# Altium PCB horus_psu.PcbDoc
Units mm, origin at the board's own origin, x right, y up, seen from the top; angles counter-clockwise.
Board outline 32.23 x 19.11 mm, 2 copper layers (Top Layer, Bottom Layer); 23 components, 14 nets, 83 pads, 20 vias.
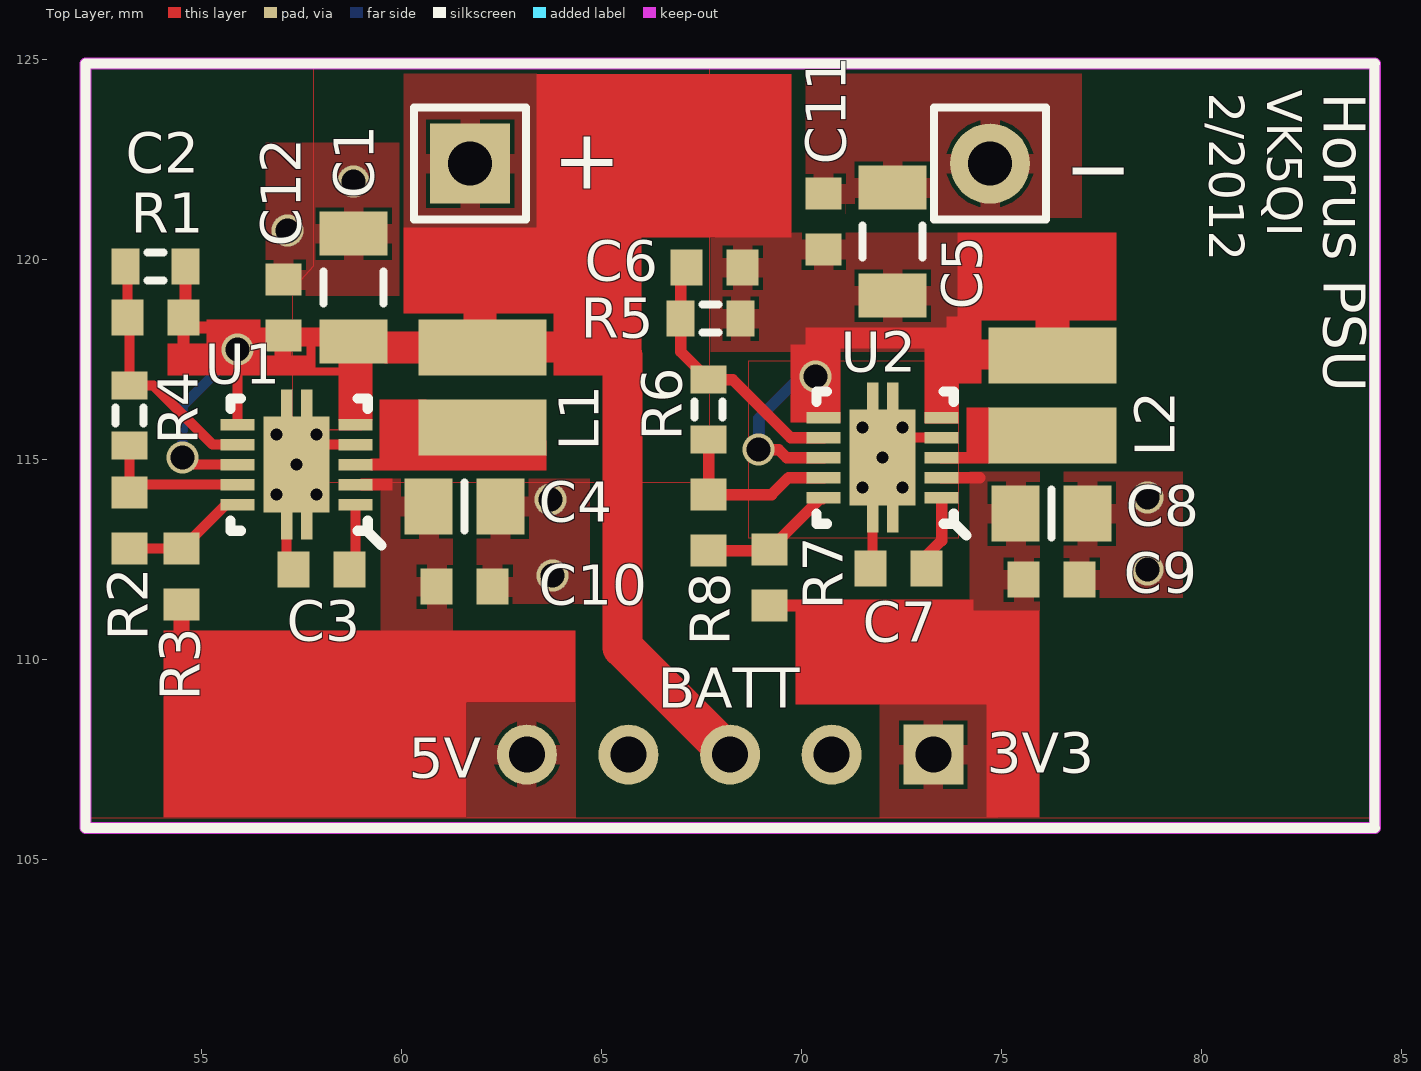
[diagram p0: Top Layer view]
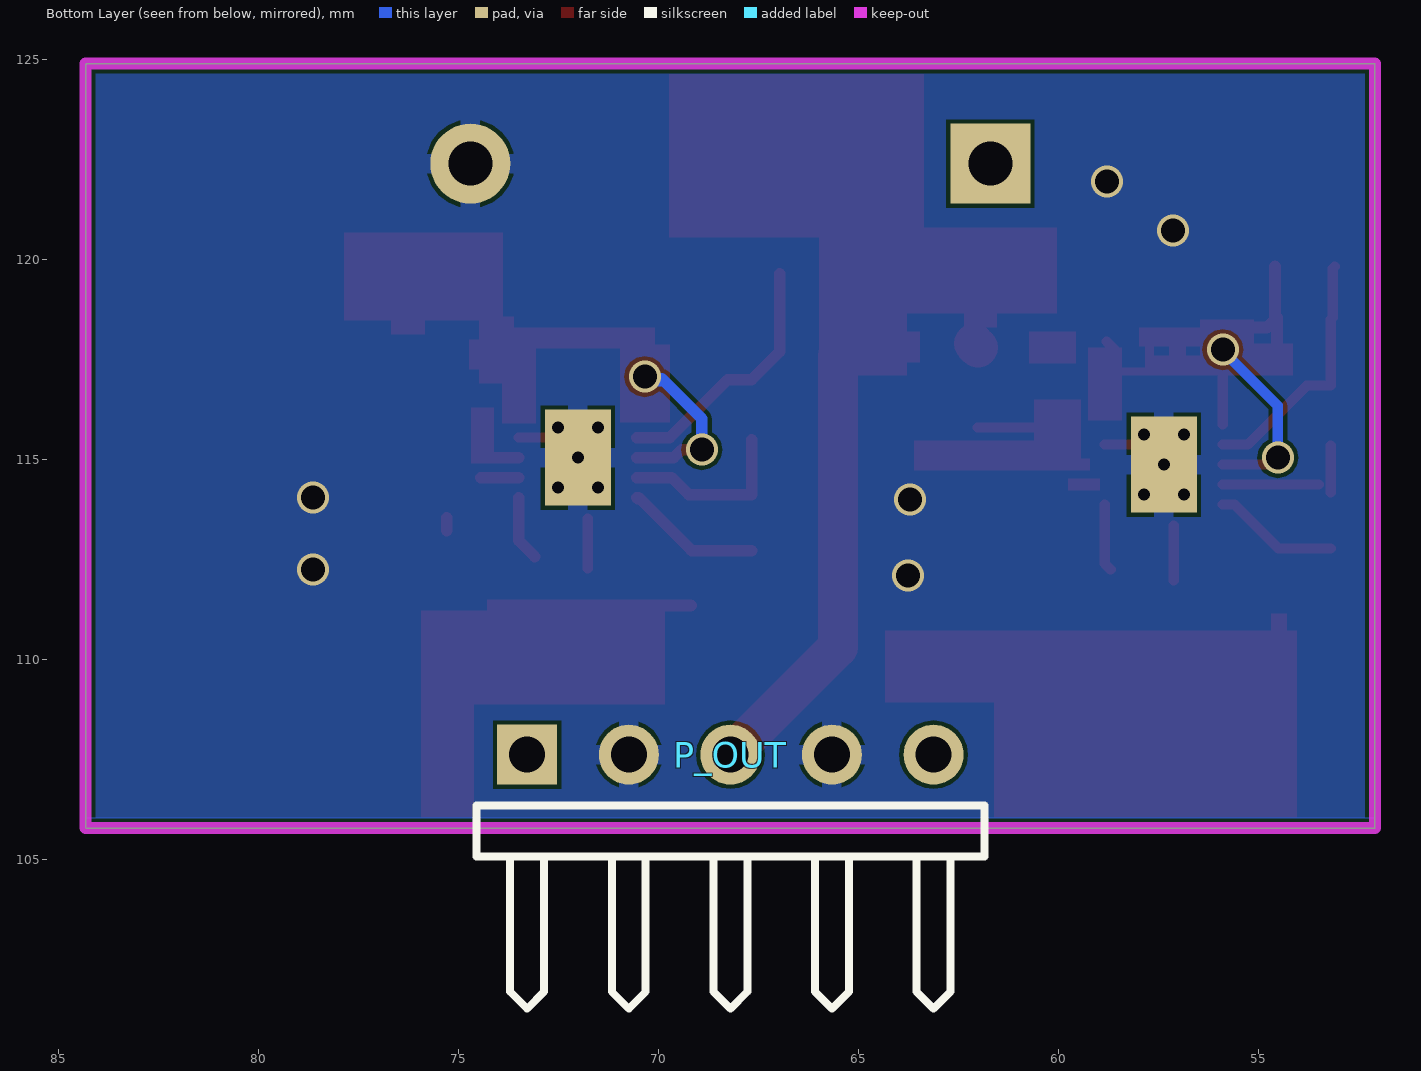
[diagram p1: Bottom Layer view, seen from below]

## Layer stack, top to bottom
Top Layer: signal copper 0.0356
Dielectric: dielectric 0.32, FR-4, Dk 4.8
Bottom Layer: signal copper 0.0356

## Board outline
52.1,105.791 52.1,124.9 84.328,124.9 84.328,105.791

## Design rules (kind name [scope] priority, off if disabled: settings)
Clearance [All] p1: gap=0.1
ComponentClearance [All] p1 off: gap=0.254 collisioncheckmode=3 verticalgap=0.254 showdistances=FALSE
PolygonConnect PolygonConnect_1 [IsVia] p1: connectstyle=Direct reliefconductorwidth=0.254 reliefentries=4 polygonreliefangle="90 Angle"
PolygonConnect [All] p2: connectstyle=Relief reliefconductorwidth=0.5 reliefentries=4 polygonreliefangle="90 Angle"
RoutingVias [All] p1: holewidth=0.3 width=0.4 viastyle="Through Hole" minholewidth=0.711 minwidth=1.27 maxholewidth=0.711 maxwidth=1.27
SilkscreenOverComponentPads [All] p1: minsilkscreentomaskgap=0.254
SolderMaskExpansion [All] p1: expansion=0.102
Width [All] p1: maxlimit=5 minlimit=0.1 preferedwidth=0.3
26 further rules are at their usual default settings.

## Components (designator, comment, footprint, x,y, rotation, side; value= is the part's Value field where it differs from the comment)
C1 "10V" C1206 58.8,119.3 r270 top
C2 "Cap Semi" 1608[0603] 53.85,118.55 r0 top
C3 "Cap Semi" 1608[0603] 58,112.25 r0 top
C4 "6.3V" 6-0805_N 61.575,113.825 r180 top
C5 "10V" C1206 72.275,120.45 r270 top
C6 "Cap Semi" 1608[0603] 67.825,119.8 r0 top
C7 "Cap Semi" 1608[0603] 72.425,112.275 r0 top
C8 "6.3V" 6-0805_N 76.25,113.65 r180 top
C9 "Cap Semi" 1608[0603] 76.25,112 r180 top
C10 "Cap Semi" 1608[0603] 61.575,111.825 r180 top
C11 "Cap Semi" 1608[0603] 70.55,120.95 r270 top
C12 "Cap Semi" 1608[0603] 57.05,118.8 r270 top
L1 "ELLVGG2R2N" ELLVGG 62.025,116.8 r90 top
L2 "ELLVGG2R2N" ELLVGG 76.275,116.6 r90 top
P_OUT "Header 5H" HDR1X5H 73.29,107.625 r180 bottom
R1 "Res3" J1-0603 53.85,119.825 r0 top
R2 "Res3" J1-0603 53.2,116.1 r90 top
R3 "Res3" 1608[0603] 54.5,112.075 r270 top
R4 "Res3" 1608[0603] 53.2,113.475 r270 top
R5 "Res3" J1-0603 67.725,118.525 r0 top
R6 "Res3" J1-0603 67.675,116.25 r90 top
R7 "Res3" 1608[0603] 69.2,112.05 r270 top
R8 "Res3" 1608[0603] 67.675,113.425 r270 top

## Footprints (in the part's own frame and the unit in brackets; to place one, negate y for a bottom-side part, rotate by r counter-clockwise, add the part's x,y. Pads: shape width x height; smd on the part's side, far side on the other; paste and mask are expansions set on the pad)
6-0805_N [mm] "Chip Resistor, Body 2.0x1.2mm, IPC Medium Density"
  rect 1.2x1.4 smd: 1(-0.9,0) 2(0.9,0)
  silkscreen extent 0,-0.6 0,0.6, body extent -1.07,-0.7 1.07,0.7, height 0.7
1608[0603] [mm] "Chip Capacitor, Body 1.6x0.8mm, IPC High Density"
  rect 0.8x0.9 smd: 1(-0.7,0) 2(0.7,0)
  body extent -0.87,-0.48 0.87,0.48, height 1.3
C1206 [mm] "Chip Capacitor, Body 3.2x1.6mm, IPC High Density"
  rect 1.1x1.7 smd: 1(-1.35,0) 2(1.35,0)
  silkscreen extent -0.4,-0.75 0.4,0.75, body extent -1.7,-0.9 1.7,0.9, height 1.3
ELLVGG [mm]
  rect 1.4x3.2 smd: 1(1,0) 2(-1,0)
HDR1X5H [mm] "Connector; Header; 5 Position; Right Angle"
  rect 1.5x1.5 hole 0.9: 1(0,0)
  round 1.5 hole 0.9: 2(2.54,0) 3(5.08,0) 4(7.62,0) 5(10.16,0)
  silkscreen extent -1.27,-6.35 11.43,-1.27
J1-0603 [mm] "Chip Resistor, Body 1.6x0.8mm, IPC High Density"
  rect 0.7x0.9 smd: 1(-0.75,0) 2(0.75,0)
  silkscreen extent -0.2,-0.35 0.2,0.35, body extent -0.85,-0.48 0.85,0.48, height 0.9

## Part data
C1 C4 C5 C8: library part "Cap Semi", "Capacitor (Semiconductor SIM Model)"
C2 C3 C6 C7 C9 C10 C11 C12: "Capacitor (Semiconductor SIM Model)"
L1 L2: library part Inductor, "Inductor"
P_OUT: "Header, 5-Pin, Right Angle"
R1 R2 R3 R4 R5 R6 R7 R8: "Resistor"

## Free pads (board coordinates)
  rect 0.28x0.7 smd: 0(57.125,113.351) 0(57.125,116.399) 0(57.625,113.351) 0(57.625,116.399) 0(71.775,113.526) 0(71.775,116.574) 0(72.275,113.526) 0(72.275,116.574)
  rect 1.65x2.4 smd: 0(57.375,114.875) 0(72.025,115.05)
  rect 1.65x2.4 smd far side: 0(57.375,114.875) 0(72.025,115.05)
  rect 0.85x0.28 smd: 1(58.85,113.875) 1(73.5,114.05) 2(58.85,114.375) 2(73.5,114.55) 3(58.85,114.875) 3(73.5,115.05) 4(58.85,115.375) 4(73.5,115.55) 5(58.85,115.875) 5(73.5,116.05) 6(55.9,115.875) 6(70.55,116.05) 7(55.9,115.375) 7(70.55,115.55) 8(55.9,114.875) 8(70.55,115.05) 9(55.9,114.375) 9(70.55,114.55) 10(55.9,113.875) 10(70.55,114.05)
  rect 2x2 hole 1.1: 1(61.71,122.4)
  round 2 hole 1.1: 1(74.71,122.4)

## Via types
v1: diameter 0.8, hole 0.6, Top Layer to Bottom Layer, tented both sides, 10 vias
v2: diameter 0.4, hole 0.3, Top Layer to Bottom Layer, 10 vias

## Nets (pads, with @x,y where several pads share a name; then routed paths per layer and width w, separated by ;. In a path a pad name is that pad's centre, name@x,y a point inside that pad or via, vN(x,y) a via of type N, cw(c..) or ccw(c..) an arc to the next point about the centre after c; other vN are vias at no path point)
3V3: C8.2 C9.2 P_OUT.1 pad.2@73.5,114.55 R7.2 | length 2.3
  Top Layer w0.28: pad.2@73.5,114.55 74.45,114.55 ; C8.2@75.3,113.225 C8.2@75.3,113.55
  Top Layer w0.3: R7.2 70.175,111.35
5V: C4.2 C10.2 P_OUT.5 pad.2@58.85,114.375 R3.2
GND: C1.1 C3.1 C4.1 C5.1 C7.1 C8.1 C9.1 C10.1 C11.1 C12.1 P_OUT.2 P_OUT.4 pad.0 pad.1@74.71,122.4 pad.4 | length 6
  Top Layer w0.254: C3.1@57.125,111.975 pad.0@57.125,113.351 ; v2(57.375,114.875) 57.875,115.375 pad.4@58.85,115.375 ; C7.1@71.775,112.275 pad.0@71.775,113.526 ; v2(72.025,115.05) 72.525,115.55 pad.4@73.5,115.55
  other v1: 63.775,112.1 78.65,112.25 63.725,114 78.65,114.05 57.15,120.725 58.8,121.95
  other v2: 56.875,114.125 57.875,114.125 71.525,114.3 72.525,114.3 56.875,115.625 57.875,115.625 71.525,115.8 72.525,115.8
NetC2_1: C2.1 pad.7@55.9,115.375 R1.1 R2.2 | length 6.3
  Top Layer w0.254: R1.1 53.15,119.775 C2.1 53.2,118.5 R2.2 53.8,116.85 55.275,115.375 pad.7@55.9,115.375
NetC3_2: C3.2 pad.1@58.85,113.875 | length 1.7
  Top Layer w0.254: C3.2 58.85,112.4 pad.1@58.85,113.875
NetC6_1: C6.1 pad.7@70.55,115.55 R5.1 R6.2 | length 6.4
  Top Layer w0.28: C6.1@66.975,119.65 R5.1 66.975,117.7 R6.2 68.275,117 69.725,115.55 pad.7@70.55,115.55
NetC7_2: C7.2 pad.1@73.5,114.05 | length 1.6
  Top Layer w0.28: C7.2@73.1,112.575 73.5,112.975 pad.1@73.5,114.05
NetL1_2: L1.2 pad.3@58.85,114.875 | length 1.4
  Top Layer w0.254: L1.2@60.65,115.8 L1.2
NetL2_2: L2.2 pad.3@73.5,115.05 | length 0.9
  Top Layer w0.28: pad.3@73.5,115.05 74.4,115.05
NetR2_1: pad.9@55.9,114.375 R2.1 R4.1 | length 3.6
  Top Layer w0.254: R4.1 R2.1 ; R4.1@53.5,114.375 pad.9@55.9,114.375
NetR3_1: pad.10@55.9,113.875 R3.1 R4.2 | length 3.2
  Top Layer w0.254: R4.2 R3.1 55.6,113.875 pad.10@55.9,113.875
NetR6_1: pad.9@70.55,114.55 R6.1 R8.1 | length 4.4
  Top Layer w0.28: R6.1 R8.1 69.25,114.125 69.675,114.55 pad.9@70.55,114.55
NetR7_1: pad.10@70.55,114.05 R7.1 R8.2 | length 3.5
  Top Layer w0.28: R8.2 69.175,112.725 R7.1 70.5,114.05 70.55,114.05 pad.10@70.525,114.025
V_BATT: C1.2 C2.2 C5.2 C6.2 C11.2 C12.2 L1.1 L2.1 P_OUT.3 pad.1@61.71,122.4 pad.5 pad.6 pad.8 R1.2 R5.2 | length 26.4
  Top Layer w0.254: v1(54.525,115.05) 54.7,114.875 pad.8@55.9,114.875 ; pad.6@55.9,115.875 55.9,117.35 ; C1.2@58.6,117.75 C1.2 ; pad.1@61.23,121.92 pad.1@61.71,122.4
  Top Layer w0.28: v1(68.925,115.25) 69.425,115.25 69.625,115.05 pad.8@70.55,115.05
  Top Layer w0.3: 54.55,117.725 C2.2 ; R1.2 54.6,118.6 C2.2 ; 55.525,118.3 54.8,118.3 C2.2
  Top Layer w1: L1.1 L1.1@62.125,117.9 ; 65.225,117.9 65.525,117.6 65.525,110.31 P_OUT.3
  Bottom Layer w0.254: v1(54.525,115.05) 54.525,116.35 55.9,117.725 v1(55.9,117.75)
  Bottom Layer w0.28: v1(68.925,115.25) 68.925,116.025 69.925,117.025 69.975,116.975 v1@70.45,116.975
  other v1: 70.35,117.075

## Polygon pours and split planes (outlines as drawn)
GND on Bottom Layer "Top Layer-No Net" (solid, shelved, pour order 16): 52.1,106.045 52.1,124.9 84.328,124.9 84.328,106.045
V_BATT on Top Layer "Top Layer-No Net" (solid, shelved, pour order 10): 67.691,124.9 67.691,114.427 57.409,114.427 57.277,114.574 57.277,115.746 58.991,115.746 57.277,115.746 57.277,119.263 57.804,119.849 57.804,124.9
no net on Top Layer "Top Layer-No Net" (solid, shelved, pour order 12): 68.675,117.475 73.795,117.475 73.914,117.322 73.914,113.03 68.675,113.03
GND on Top Layer "Top Layer-No Net" (solid, shelved, pour order 14): 52.1,124.9 52.1,106.045 84.328,106.045 84.328,124.9
GND on Bottom Layer "Top Layer-No Net" (solid, pour order 18): 52.175,105.791 52.175,124.825 52.1,124.9 84.328,124.9 84.328,105.791
5V on Top Layer "Top Layer-No Net" (solid, pour order 42): 61.275,110.35 61.275,114.525 59.45,114.525 59.475,114.498 59.475,110.377
3V3 on Top Layer "Top Layer-No Net" (solid, pour order 40): 74.2,111.225 74.2,114.7 75.95,114.7 75.95,111.225
GND on Top Layer "Top Layer-No Net" (solid, pour order 38): 61.875,114.525 61.875,111.4 64.7,111.4 64.7,114.525
GND on Top Layer "Top Layer-No Net" (solid, pour order 36): 76.55,111.55 76.55,114.7 79.525,114.7 79.525,111.55
GND on Top Layer "Top Layer-No Net" (solid, pour order 34): 56.6,119.1 59.975,119.1 60.05,119.1 60.05,122.925 56.6,122.925
3V3 on Top Layer "Top Layer-No Net" (solid, pour order 32): 71.95,106.025 74.9,106.025 74.9,109.05 71.95,109.05
GND on Top Layer "Top Layer-No Net" (solid, pour order 28): 70.1,121.05 70.1,124.65 77,124.65 77,121.05
V_BATT on Top Layer "Top Layer-No Net" (solid, pour order 26): 67.725,120.55 67.725,117.7 73.9,117.7 73.9,120.675 68.901,120.675
V_BATT on Top Layer "Top Layer-No Net" (solid, pour order 24): 60.05,120.575 60.05,124.65 63.375,124.65 63.375,120.575
5V on Top Layer "Top Layer-No Net" (solid, pour order 22): 64.35,108.925 64.35,106.05 61.625,106.05 61.625,108.925

## Keep-outs
Keep-Out Layer:
  the board outline again, w0.3

## Other copper
Top Layer:
  rectangle net V_BATT: 57.625,117.575 57.85,118
  rectangle net V_BATT: 56.225,117.825 58,118.3
  rectangle net V_BATT: 56.825,117.525 57.25,117.925
  rectangle net V_BATT: 56.35,117.1 57.85,117.6
  rectangle net V_BATT: 56.35,117.1 59.275,117.3
  rectangle net 3V3: 74.2,108.875 75.95,111.225
  rectangle net V_BATT: 61.55,118.3 62.375,119.125
  rectangle net V_BATT: 59.575,117.4 60.75,118.2
  rectangle net V_BATT: 63.475,117.425 64.45,118.2
  rectangle net V_BATT: 60.05,118.65 64.3,120.8
  rectangle net V_BATT: 73.925,117.25 74.75,118
  rectangle net V_BATT: 75.85,118.125 76.7,118.775
  rectangle net V_BATT: 69.725,115.925 70.975,117.875
  rectangle net 3V3: 69.85,108.875 74.3,111.5
  rectangle net 3V3: 74.625,106.05 75.95,109.225
  rectangle net NetL2_2: 74.125,114.9 74.7,116.3
  rectangle net V_BATT: 73.9,118.475 77.875,120.675
  rectangle net V_BATT: 70.1,117.775 73.9,118.3
  rectangle net V_BATT: 54.15,117.1 55.125,117.9
  rectangle net V_BATT: 63.375,120.55 69.75,124.645
  rectangle net 5V: 54.3,110.525 54.7,111.15
  rectangle net 5V: 54.05,106.05 61.625,110.725
  rectangle net 5V: 59.475,108.925 64.35,110.725
  rectangle net 5V: 59.475,108.95 61.275,110.7
  rectangle net V_BATT: 63.8,117.1 66,120.575
  rectangle net 5V: 58.975,114.225 59.775,114.525
  rectangle net NetL1_2: 59.45,114.725 60.625,116.5
  rectangle net V_BATT: 73.625,116.9 74.5,118.575
  rectangle net V_BATT: 73.075,115.9 73.925,117.875
  rectangle net NetL1_2: 59.225,114.725 61.075,115.025
  rectangle net NetL1_2: 60.425,114.725 63.625,115.475
  rectangle net V_BATT: 58.425,115.975 59.275,117.8
  rectangle net V_BATT: 55.125,117.1 56.475,118.5
  pour cut-out: 71.1,121.4 71.325,121.4 71.325,120.95 71.225,121.05 71.1,121.05

## Silkscreen, mask and mechanical layers (free items; w line width, h text height)
Top Overlay:
  lines w0.2: 60.31,121 60.31,123.8 63.11,123.8 63.11,121 60.31,121 ; 73.31,121 76.11,121 76.11,123.8 73.31,123.8 73.31,121
  lines w0.254: 55.724,113.478 55.724,113.224 55.978,113.224 ; 55.724,116.272 55.724,116.526 55.978,116.526 ; 58.899,113.224 59.153,113.224 59.153,113.478 ; 58.899,116.526 59.153,116.526 59.153,116.272 ; 59.125,113.224 59.126,113.224 59.5,112.85 ; 70.374,113.653 70.374,113.399 70.628,113.399 ; 70.374,116.447 70.374,116.701 70.628,116.701 ; 73.549,113.399 73.803,113.399 ; 73.549,116.701 73.803,116.701 73.803,116.447 ; 73.803,113.653 73.803,113.399 ; 74.125,113.1 73.826,113.399 73.803,113.399 ; 84.325,105.794 84.325,124.897 84.328,124.9 84.253,124.9 52.1,124.9 52.1,105.791 82.566,105.791 84.328,105.791
  text "VK5QI" at 81.35,124.25 h1.5 r270
  text "2/2012" at 79.9,124.175 h1.5 r270
  text "Horus PSU" at 82.7,124.175 h1.8 r270
  text "_" at 76.8,122.7 h1.8
  text "+" at 63.775,121.775 h1.5
  text "U2" at 70.975,117.2 h1
  text "U1" at 55.075,116.9 h1
  text "BATT" at 66.4,108.8 h1
  text "3V3" at 74.625,107.175 h1
  text "5V" at 60.175,107.05 h1
Drill Drawing:
  text ".LEGEND" at 105.88,81.28 h1.52
  text "Drill Drawing." at 105.88,78.74 h1.52

## Dimensions
52.1,105.791 to 84.328,105.791 on Mechanical 1
52.1,105.791 to 52.1,124.9 on Mechanical 1